# Allegro board PCB.brd
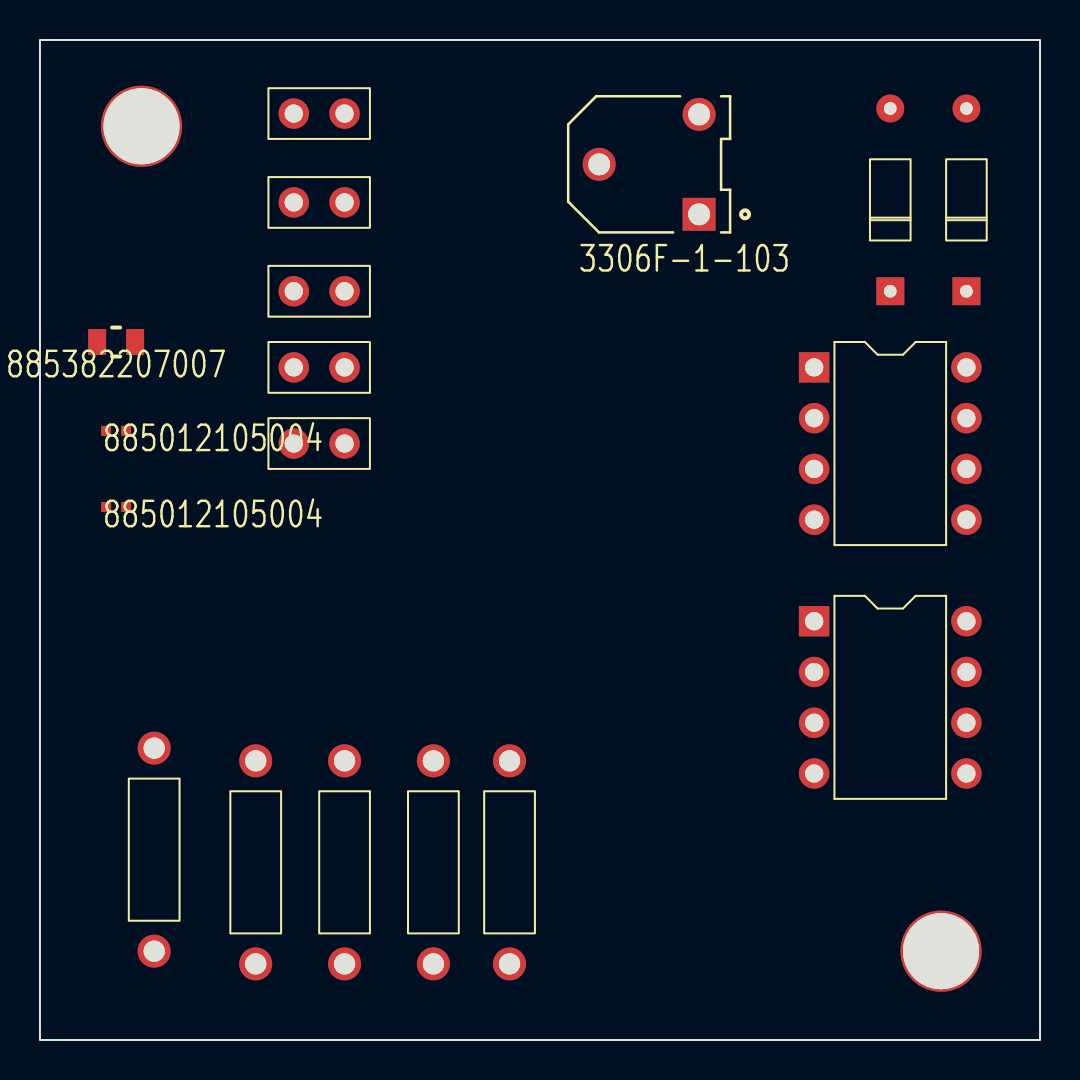
[diagram p0: board, top side]
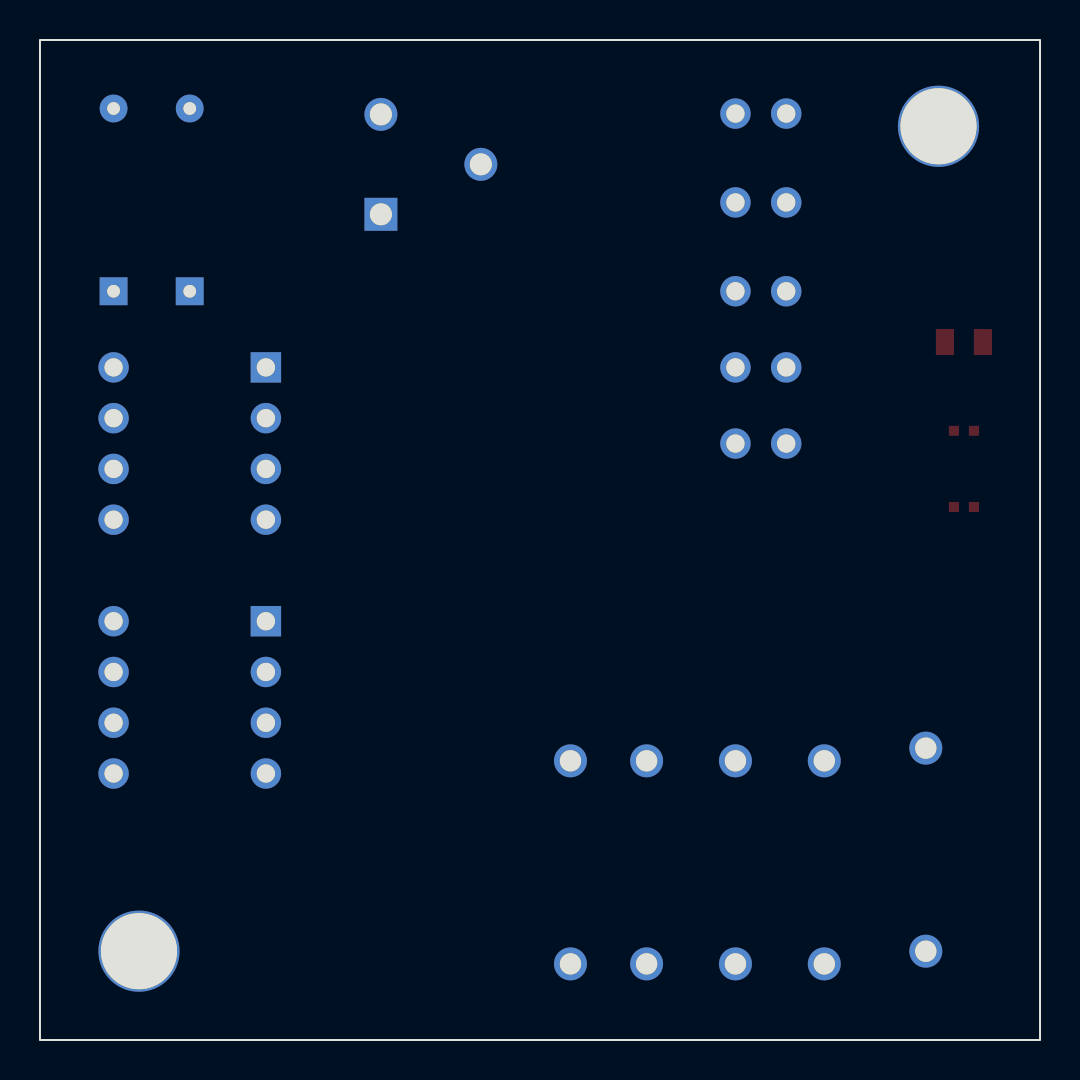
[diagram p1: board, bottom side, seen from below]

Outline 50.04 x 50.04 mm; copper layers: TOP, BOTTOM. Coordinates in mm from the lower left corner of the outline.
Outline path: rectangle 0,0 50.04,50.04

## Design rules (mm)
constraint set DEFAULT: min track width 0.127
nets with their own width: min track width 1.201; nets VCC_BAR

## Placement (name value [footprint] x y rotation side)
BAT1  9V  [JUMPER2]  12.7 46.36 0 top
BAT2  9V  [JUMPER2]  12.7 41.91 0 top
C1  100n  [WCAP-CSST_885382207007]  3.81 34.93 0 top
C2  470n  [WCAP-CSGP_885012105004]  3.81 30.48 0 top
C3  470n  [WCAP-CSGP_885012105004]  3.81 26.67 0 top
D1  1N4148  [DO35]  46.36 37.46 0 top
D2  1N4148  [DO35]  42.55 37.46 0 top
J1  CON2  [JUMPER2]  12.7 37.46 0 top
J2  CON2  [JUMPER2]  12.7 29.84 0 top
M1  100uA  [JUMPER2]  12.7 33.65 0 top
NOREF  -  [unnamed]  45.09 4.44 0 top
NOREF#2  -  [unnamed]  5.08 45.72 0 top
P1  10K  [TRIM_3306F-1-103]  30.48 43.81 0 top
R1  47K  [RES400]  5.72 4.44 0 top
R2  1M  [RES400]  10.8 3.81 0 top
R3  3.3K  [RES400]  15.24 3.81 0 top
R4  10K  [RES400]  19.69 3.81 0 top
R5  10M  [RES400]  23.5 3.81 0 top
U1  IC1  [DIP8_3]  38.74 20.95 0 top
U2  IC2  [DIP8_3]  38.74 33.65 0 top

## Library data of the parts
BAT1 BAT2 = BATTERY: User Part Number: ***
C1-C3 = CAP NP
D1 D2 = 1N4148
J1 J2 = CON2: User Part Number: ***
M1 = METER A: User Part Number: ***
P1 = POT
R1-R5 = R: Tolerance: ***; User Part Number: ***
U1 U2 = LF356_1: Tolerance: ***; User Part Number: ***

## Footprints (pads in the part's own frame, mm; a bottom-side part is the same pattern mirrored in y, then rotated)
DIP8_3
  rect 1.524x1.524 hole 0.914: 1(0,0)
  round 1.524 hole 0.914: 2(0,-2.54) 3(0,-5.08) 4(0,-7.62) 5(7.62,-7.62) 6(7.62,-5.08) 7(7.62,-2.54) 8(7.62,0)
DO35
  rect 1.397x1.397 hole 0.635: 1(0,0)
  round 1.397 hole 0.635: 2(0,9.144)
JUMPER2
  round 1.524 hole 0.914: 1(0,0) 2(2.54,0)
RES400
  round 1.651 hole 1.067: 1(0,0) 2(0,10.16)
TRIM_3306F-1-103
  rect 1.65x1.65 hole 1.1: 1(2.5,-2.5)
  round 1.65 hole 1.1: 2(-2.5,0) 3(2.5,2.5)
unnamed
  round 4.064 hole 3.81: (0,0)
WCAP-CSGP_885012105004
  rect 0.5x0.5 smd: 1(-0.5,0) 2(0.5,0)
WCAP-CSST_885382207007
  rect 0.9x1.3 smd: 1(-0.95,0) 2(0.95,0)

## Nets
VCC_BAR: BAT1.2(-) BAT2.1 C1.1 J2.2 M1.1 P1.3 U2.3
4: BAT2.2(-) J1.1 U1.4(V-) U2.4(V-)
7: BAT1.1 U1.7 U2.7
N00174: D1.1(CAT) D2.2 R3.2 R4.1 U1.2 U1.6
N00253: C1.2 R2.2 U1.3
N00298: C2.1 C3.1 D1.2 D2.1(CAT) R5.2 U2.2
N00306: C2.2 C3.2 J2.1 R1.1 U2.6
N00435: P1.1 P1.2(WIPER) R4.2 R5.1
N07087: J1.2 R1.2 R2.1
N16595: M1.2 R3.1

Pads without a net: U1 1 5 8; U2 1 5 8
